# Altium PCB Carte_Herse_2020-4L.PcbDoc
Units mm, origin at the board's own origin, x right, y up, seen from the top; angles counter-clockwise.
Board outline 26 x 15.5 mm, 4 copper layers (Top Copper, Ground Plane, Power Plane, Bottom Copper), stack 1.57 mm thick; 4 components, 6 nets, 35 pads, 5 vias.
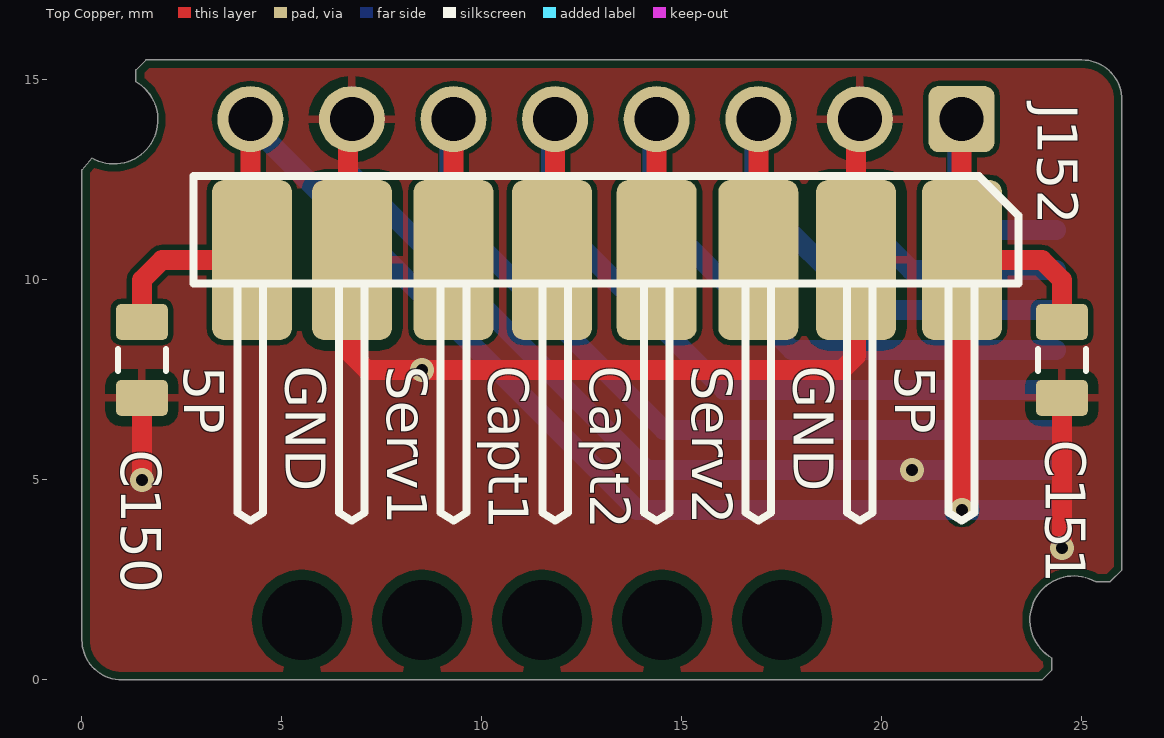
[diagram p0: Top Copper view]
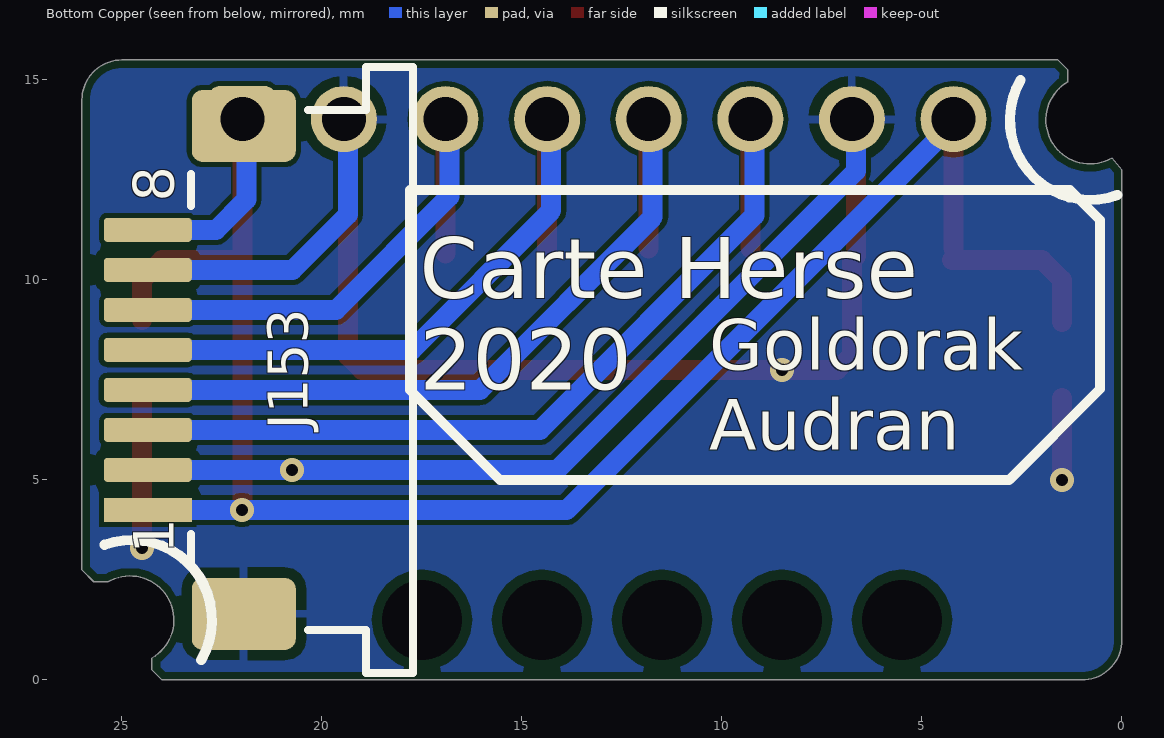
[diagram p1: Bottom Copper view, seen from below]
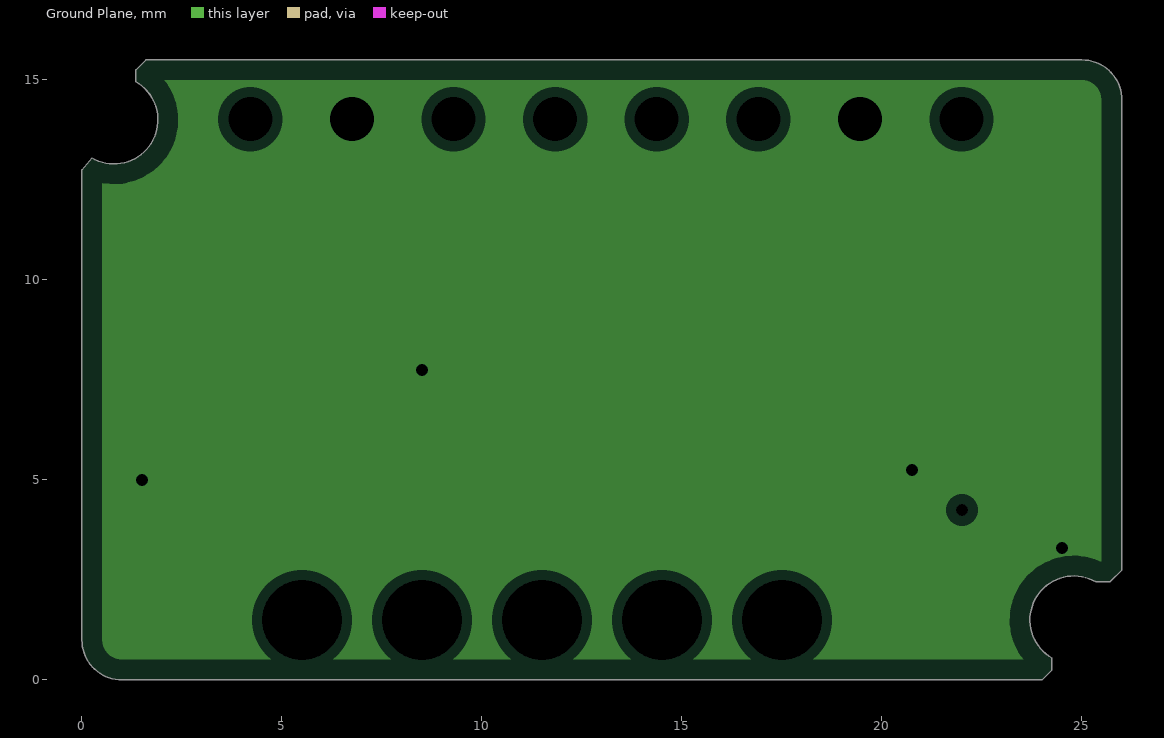
[diagram p2: Ground Plane, clearances drawn from the general rule]
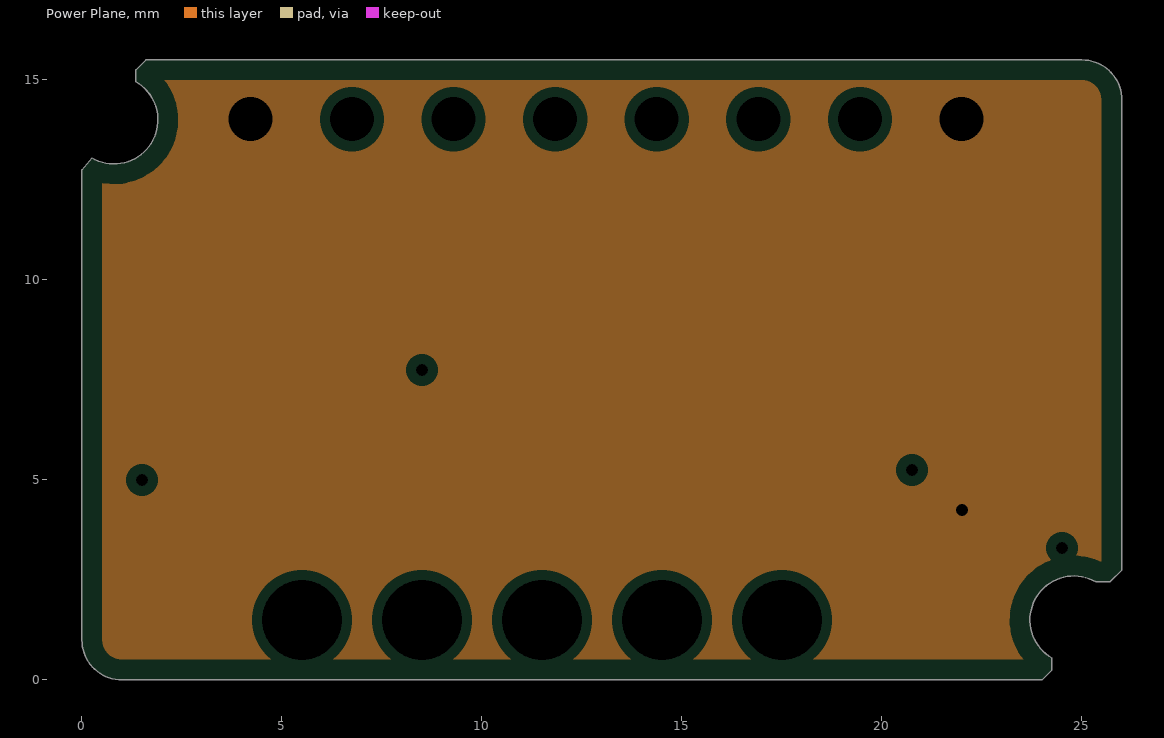
[diagram p3: Power Plane, clearances drawn from the general rule]
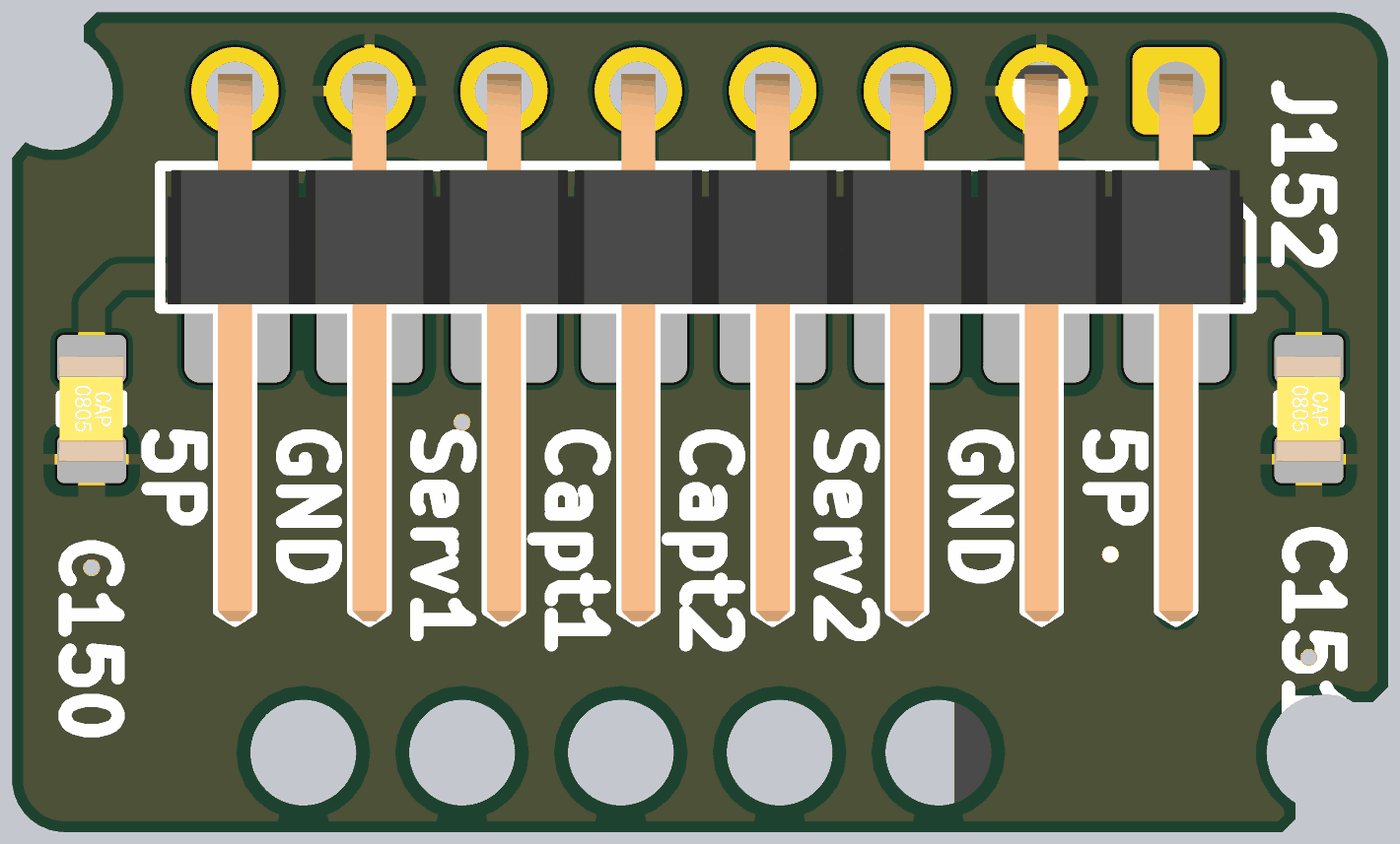
[diagram p4: 3D render of the assembled board from above, using the file's embedded part models]

## Layer stack, top to bottom
Top Mask: solder mask 0.015, Solder Resist, Dk 3.8
Top Copper: signal copper 0.035
Dielectric 1: prepreg 0.2, 7628, Dk 4.6
Ground Plane: plane copper 0.0175, net GND
Core: core 1.065, FR-4, Dk 4.5
Power Plane: plane copper 0.0175, net 5P
Dielectric 2: prepreg 0.2, 7628, Dk 4.6
Bottom Copper: signal copper 0.035
Bottom Mask: solder mask 0.015, Solder Resist, Dk 3.8

## Board outline
0,1 0,12.75 0.25,13.047 ccw(c0.8,14) 1.35,14.953 1.35,15.25 1.6,15.5 25,15.5 cw(c25,14.5) 26,14.5 26,2.75 25.703,2.453 25.35,2.453 ccw(c24.8,1.5) 24.25,0.547 24.25,0.25 24,0 1,0 cw(c1,1)

## Design rules (kind name [scope] priority, off if disabled: settings)
AssemblyTestPointUsage [All] p1 off:
AssemblyTestpoint [All] p1 off: testpointundercomponent=TRUE minsize=1.016 maxsize=2.54 preferedsize=1.524 minholesize=0 maxholesize=1.016 preferedholesize=0.813 testpointgrid=0.025 usegrid=TRUE gridtolerance=0 allowsidetop=TRUE allowsidebottom=TRUE
BoardOutlineClearance [All] p1: gap=0.2 ignorepadtopadclearanceinfootprint=FALSE
Clearance Clearance_Outer_layer [OnOutside] p1: gap=0.127 ignorepadtopadclearanceinfootprint=FALSE except(0.09: Arc-Arc Arc-Track Track-Track; 0.2: Arc-SMDPad Track-SMDPad; 0.254: Arc-Hole Track-Hole SMDPad-Hole THPad-Hole Via-Hole Fill-Hole Poly-Hole Region-Hole Text-Hole; 0.33: Arc-THPad Track-THPad SMDPad-THPad; 0.54: THPad-THPad)
Clearance Clearance_Inner_layer [not OnOutside] p2: gap=0.127 ignorepadtopadclearanceinfootprint=FALSE except(0.2: Arc-SMDPad Track-SMDPad; 0.254: Arc-Hole Track-Hole SMDPad-Hole THPad-Hole Via-Hole Fill-Hole Poly-Hole Region-Hole Text-Hole; 0.33: Arc-THPad Track-THPad SMDPad-THPad; 0.54: THPad-THPad)
ComponentClearance [IsComponent and (not (InComponent('J202') or InComponent('J204'))) vs IsComponent and (not (InComponent('J201') or InComponent('J203')))] p1: gap=0.2 collisioncheckmode=3 verticalgap=2540 showdistances=FALSE
DiffPairsRouting [All] p1 off: maxlimit=0.254 minlimit=0.254 mostfreqgap=0.254 toplayer_minwidth=0.381 toplayer_maxwidth=0.381 toplayer_prefwidth=0.381 bottomlayer_minwidth=0.381 bottomlayer_maxwidth=0.381 bottomlayer_prefwidth=0.381 maxuncoupledlength=12.7
FabricationTestPointUsage TestPointUsage [All] p1 off: valid=0 allowmultiple=FALSE
FabricationTestpoint Testpoint [All] p1 off: side=3 testpointundercomponent=TRUE minsize=1.016 maxsize=2.54 preferedsize=1.524 minholesize=0 maxholesize=1.016 preferedholesize=0.813 testpointgrid=0.025 allowsidetop=TRUE allowsidebottom=TRUE usegrid=TRUE gridtolerance=0
FanoutControl Fanout_BGA [IsBGA] p1 off: bgadir=Out bgaviamode=Centered fanoutstyle=Auto fanoutdirection=Alternating viagrid=0.025 // Fanout_BGA (Default Rule)
FanoutControl Fanout_LCC [IsLCC] p2 off: bgadir=Out bgaviamode=Centered fanoutstyle=Auto fanoutdirection=Alternating viagrid=0.025 // Fanout_LCC (Default Rule)
FanoutControl Fanout_SOIC [IsSOIC] p3 off: bgadir=Out bgaviamode=Centered fanoutstyle=Auto fanoutdirection=Alternating viagrid=0.025 // Fanout_SOIC (Default Rule)
FanoutControl Fanout_Small [(CompPinCount < 5)] p4 off: bgadir=Out bgaviamode=Centered fanoutstyle=Auto fanoutdirection=OutThenIn viagrid=0.025 // Fanout_Small (Default Rule)
FanoutControl Fanout_Default [All] p5 off: bgadir=Out bgaviamode=Centered fanoutstyle=Auto fanoutdirection=Alternating viagrid=0.025 // Fanout_Default (Default Rule)
HoleSize [All] p1: absolutevalues=TRUE maxlimit=6.3 minlimit=0.2 maxpercent=80.000 minpercent=20.000
HoleToHoleClearance ViaToViaClearance [IsVia vs IsVia] p1: gap=0.254 allowstackedmicrovias=TRUE
HoleToHoleClearance [All] p2: gap=0.54 allowstackedmicrovias=TRUE
MinimumAnnularRing [All] p1: minimumring=0.13
MinimumSolderMaskSliver [All] p1: minsoldermaskwidth=0.075
NetAntennae NetAntenna [All] p1: netantennaetolerance=0
PlaneClearance [All] p1: clearance=0.254
PlaneConnect [All] p1: planeconnectstyle=Direct reliefexpansion=0.3 reliefentries=4 reliefconductorwidth=0.3 reliefairgap=0.2
PolygonConnect [All] p1: thpad.connectstyle=Relief thpad.reliefconductorwidth=0.2 thpad.reliefentries=4 thpad.polygonreliefangle="90 Angle" thpad.airgapwidth=0.254 smdpad.connectstyle=Relief smdpad.reliefconductorwidth=0.2 smdpad.reliefentries=4 smdpad.polygonreliefangle="90 Angle" smdpad.airgapwidth=0.254 via.connectstyle=Direct via.reliefconductorwidth=0.2 via.reliefentries=4 via.polygonreliefangle="90 Angle" via.airgapwidth=0.254
RoutingVias [All] p1: holewidth=0.2 width=0.5 viastyle="Through Hole" minholewidth=0.2 minwidth=0.45 maxholewidth=0.3 maxwidth=0.9
SMDEntry [All] p1: side=TRUE corner=TRUE anyangle=TRUE
SilkToSilkClearance [All] p1 off: silktosilkclearance=0.15
SilkToSolderMaskClearance [IsPad] p1: minsilkscreentomaskgap=0.15 clearancetoexposedcopper=TRUE
SolderMaskExpansion [All] p1: expansion=0.05 istentingtop=FALSE
Width Width_Outer_Layer [OnLayer('Component Side') or OnLayer('Solder Side')] p1: maxlimit=3 minlimit=0.09 preferedwidth=0.15
Width Width_Inner_Layer [All] p2: maxlimit=3 minlimit=0.127 preferedwidth=0.15
11 further rules are at their usual default settings.

## Components (designator, comment, footprint, x,y, rotation, side; value= is the part's Value field where it differs from the comment)
C150 "1uF" "WCAP-CSGP_0805, 2x1.25x1.25" 1.5,8 r270 top
C151 "1uF" "WCAP-CSGP_0805, 2x1.25x1.25" 24.5,8 r270 top
J152 "61300811021" 61300811021 13.1,11.25 r0 top value=8
J153 "68610814122" 68610814122 20.504,7.75 r90 bottom value=8

## Footprints (in the part's own frame and the unit in brackets; to place one, negate y for a bottom-side part, rotate by r counter-clockwise, add the part's x,y. Pads: shape width x height; smd on the part's side, far side on the other; paste and mask are expansions set on the pad)
61300811021 [mm] "Pin Header, pitch 2.54 mm, THT, Angled, single row, 8p"
  rrect30% 1.65x1.65 hole 1.1: 1(8.89,2.77)
  round 1.65 hole 1.1: 2(6.35,2.77) 3(3.81,2.77) 4(1.27,2.77) 5(-1.27,2.77) 6(-3.81,2.77) 7(-6.35,2.77) 8(-8.89,2.77)
  silkscreen extent -10.31,-7.27 10.31,1.35, body extent -10.16,-7.27 10.16,3.09, height 2.58
68610814122 [mm] "ZIF Connectors, Horizontal, Top Contact, pitch 1mm, 8p"
  rect 0.6x2.2 smd: 1(-3.5,3.85)
  rrect30% 0.6x2.2 smd: 2(-2.5,3.85) 3(-1.5,3.85) 4(-0.5,3.85) 5(0.5,3.85) 6(1.5,3.85) 7(2.5,3.85) 8(3.5,3.85)
  rrect30% 1.8x2.6 smd: MP1(-6.1,1.45) MP2(6.1,1.45)
  silkscreen extent -7.58,-2.78 7.58,2.78, body extent -7.5,-2.7 7.5,4.4, height 3.02
"WCAP-CSGP_0805, 2x1.25x1.25" [mm] "WCAP-CSGP Ceramic Capacitors, size 0805, body 2x1.25x1.25"
  rrect30% 0.9x1.3 smd: 1(-0.95,0) 2(0.95,0)
  silkscreen extent -0.28,-0.6 0.28,0.6, body extent -1,-0.63 1,0.62, height 1.25

## Part data
C150 C151: library part "WCAP-CSGP, 885012207103", "CAP CER 1uF 50V X7R 0805", Manufacturer="Wurth Elektronik", Manufacturer Part Number=885012207103, RatedVoltage=50V, CeramicType=X7R, ComponentLink1Description=Datasheet, ComponentLink1URL=http://katalog.we-online.com/pbs/datasheet/885012207103.pdf, Size=0805, SUPPLIER 2=JLCPCB, Supplier Footprint 2=0805, SUPPLIER PART NUMBER 2=C28323
J152: "WR-PHD Header THT 2.54mm, Single Row, Angled, 8pin", Manufacturer="Wurth Electronics Inc.", SUPPLIER PART NUMBER 1=2356183, ComponentLink1Description=Datasheet, ComponentLink1URL=https://www.we-online.com/catalog/datasheet/61300811021.pdf, Manufacturer Part Number=61300811021, SUPPLIER 1=Farnell
J153: "WR-FPC SMT ZIF Horizontal Top Contact, pitch 1mm, 8p", Manufacturer="Wurth Electronics Inc.", SUPPLIER PART NUMBER 1=1641905, ComponentLink1Description=Datasheet, ComponentLink1URL=https://www.we-online.com/catalog/datasheet/68610814122.pdf, Manufacturer Part Number=68610814122, SUPPLIER 1=Farnell

## Free pads (board coordinates)
  rrect30% 2x4 smd: 3(4.25,10.5) 3(6.75,10.5) 3(9.29,10.5) 3(11.75,10.5) 3(14.37,10.5) 3(16.91,10.5) 3(19.35,10.5) 3(22,10.5)
  round 0 hole 2 unplated: 4(5.5,1.5) 4(8.5,1.5) 4(11.5,1.5) 4(14.5,1.5) 4(17.5,1.5)

## Via types
v1: diameter 0.6, hole 0.3, Top Copper to Bottom Copper, tented both sides, 5 vias

## Nets (pads, with @x,y where several pads share a name; then routed paths per layer and width w, separated by ;. In a path a pad name is that pad's centre, name@x,y a point inside that pad or via, vN(x,y) a via of type N, cw(c..) or ccw(c..) an arc to the next point about the centre after c; other vN are vias at no path point)
5P: C150.1 C151.1 J152.1 J152.8 J153.1 J153.8 J153.MP2 pad.3@4.25,10.5 pad.3@22,10.5 | length 49.8
  Top Copper w0.5: C150.1 1.5,10 2,10.5 pad.3@4.25,10.5 ; pad.3@4.21,10.79 J152.8 ; v1@21.99,4.25 J152.1 ; pad.3@22,10.5 24,10.5 24.5,10 C151.1@24.5,9
  Bottom Copper w0.5: J152.8@4.11,14.02 13.88,4.25 v1(22,4.25) J153.1 ; J152.1@21.89,14.02 21.89,12.01 22.65,11.25 J153.8
Capteur_1: J152.5 J153.4 pad.3@11.75,10.5 | length 20.1
  Top Copper w0.5: pad.3@11.83,10.79 J152.5
  Bottom Copper w0.5: J152.5@11.73,14.02 11.73,11.57 16.05,7.25 J153.4
Capteur_2: J152.4 J153.5 pad.3@14.37,10.5 | length 17
  Top Copper w0.5: pad.3@14.37,10.79 J152.4
  Bottom Copper w0.5: J152.4@14.27,14.02 14.27,11.73 17.75,8.25 J153.5
GND: C150.2 C151.2 J152.2 J152.7 J153.2 J153.7 J153.MP1 pad.3@6.75,10.5 pad.3@19.35,10.5 | length 60.6
  Top Copper w0.5: v1(1.5,5) C150.2 ; J152.7@6.65,14.02 6.65,10.6 6.75,10.5 6.75,8.125 7.125,7.75 v1(8.5,7.75) 19,7.75 19.35,8.1 19.35,10.5 19.35,11.633 J152.2@19.35,14.02 ; v1(24.5,3.3) C151.2
  Bottom Copper w0.5: J152.7@6.65,14.02 6.65,12.726 14.126,5.25 v1@20.733,5.25 ; J152.2@19.35,14.02 19.35,11.633 20.733,10.25 J153.7 ; v1(20.75,5.25) J153.2
Servo_1: J152.6 J153.3 pad.3@9.29,10.5 | length 23
  Top Copper w0.5: pad.3@9.29,10.79 J152.6
  Bottom Copper w0.5: J152.6@9.19,14.02 9.19,11.61 14.55,6.25 J153.3
Servo_2: J152.3 J153.6 pad.3@16.91,10.5 | length 14
  Top Copper w0.5: pad.3@16.91,10.66 J152.3
  Bottom Copper w0.5: J152.3@16.81,14.02 16.81,12.09 19.65,9.25 J153.6

## Polygon pours and split planes (outlines as drawn)
GND on Top Copper "Solder Side-GND" (solid, pour order 49): 26,0 26,15.5 0,15.5 0,0
GND on Bottom Copper "Component Side-GND" (solid, pour order 47): 26,0 26,15.5 0,15.5 0,0
GND on Ground Plane (split plane): 25.096,14.982 25.188,14.954 25.273,14.909 25.348,14.848 25.409,14.773 25.454,14.688 25.482,14.596 25.491,14.512 25.49,14.5 25.49,2.963 25.47,2.963 25.332,3.02 25.158,3.07 24.98,3.1 24.8,3.111 24.62,3.1 24.442,3.07 24.268,3.02 24.101,2.951 23.943,2.864 23.796,2.759 23.661,2.639 23.541,2.504 23.436,2.357 23.349,2.199 23.28,2.032 23.23,1.858 23.2,1.68 23.189,1.5 23.2,1.32 23.23,1.142 23.28,0.968 23.349,0.801 23.436,0.643 23.53,0.51 1,0.51 0.988,0.509 0.904,0.518 0.812,0.546 0.727,0.591 0.652,0.652 0.591,0.727 0.546,0.812 0.518,0.904 0.509,0.988 0.51,1 0.51,12.418 0.62,12.4 0.8,12.389 0.98,12.4 1.158,12.43 1.332,12.48 1.499,12.549 1.657,12.636 1.804,12.741 1.939,12.861 2.059,12.996 2.164,13.143 2.251,13.301 2.32,13.468 2.37,13.642 2.4,13.82 2.411,14 2.4,14.18 2.37,14.358 2.32,14.532 2.251,14.699 2.164,14.857 2.07,14.99 25,14.99 25.012,14.991
5P on Power Plane (split plane): 25.096,14.982 25.188,14.954 25.273,14.909 25.348,14.848 25.409,14.773 25.454,14.688 25.482,14.596 25.491,14.512 25.49,14.5 25.49,2.963 25.47,2.963 25.332,3.02 25.158,3.07 24.98,3.1 24.8,3.111 24.62,3.1 24.442,3.07 24.268,3.02 24.101,2.951 23.943,2.864 23.796,2.759 23.661,2.639 23.541,2.504 23.436,2.357 23.349,2.199 23.28,2.032 23.23,1.858 23.2,1.68 23.189,1.5 23.2,1.32 23.23,1.142 23.28,0.968 23.349,0.801 23.436,0.643 23.53,0.51 1,0.51 0.988,0.509 0.904,0.518 0.812,0.546 0.727,0.591 0.652,0.652 0.591,0.727 0.546,0.812 0.518,0.904 0.509,0.988 0.51,1 0.51,12.418 0.62,12.4 0.8,12.389 0.98,12.4 1.158,12.43 1.332,12.48 1.499,12.549 1.657,12.636 1.804,12.741 1.939,12.861 2.059,12.996 2.164,13.143 2.251,13.301 2.32,13.468 2.37,13.642 2.4,13.82 2.411,14 2.4,14.18 2.37,14.358 2.32,14.532 2.251,14.699 2.164,14.857 2.07,14.99 25,14.99 25.012,14.991

## Silkscreen, mask and mechanical layers (free items; w line width, h text height)
Top Overlay:
  text "5P" at 2.554,7.85 h1 r270
  text "GND" at 5.094,7.85 h1 r270
  text "Serv1" at 7.634,7.85 h1 r270
  text "Capt1" at 10.174,7.85 h1 r270
  text "Capt2" at 12.714,7.85 h1 r270
  text "Serv2" at 15.254,7.85 h1 r270
  text "GND" at 17.794,7.85 h1 r270
  text "5P" at 20.334,7.85 h1 r270
Bottom Overlay:
  lines w0.254: 0.116,12.121 ccw(c0.8,14) 2.532,15 ; 23.018,0.5 cw(c24.75,1.5) 25.434,3.379 ; 0.549,7.271 2.82,5 15.549,5 17.799,7.25 17.799,12.25 1.299,12.25 0.549,11.5 0.549,7.271
  text "Goldorak" at 10.32,7.75 h1.27
  text "Carte Herse / 2020" at 17.549,7.25 h1.52
  text "Audran" at 10.32,5.75 h1.27
Board Outline:
  lines w0.1: -39.254,266.475 cw(c-35.754,266.475) -35.754,269.975 ; 25,15.5 cw(c25,14.5) 26,14.5 26,2.75 25.703,2.453 25.35,2.453 ccw(c24.8,1.5) 24.25,0.547 24.25,0.25 24,0 1,0 cw(c1,1) 0,1 0,12.75 0.25,13.047 ccw(c0.8,14) 1.35,14.953 1.35,15.25 1.6,15.5 25,15.5 ; 25,15.5 25,15.5

## Dimensions
26,1 to 0,2.75 on Dimension
1,0 to 1.6,15.5 on Dimension

## Text inside footprints (layer, text, board x,y; h text height)
J153: Bottom Overlay "8" at 23.704,11.95 h1.02 r270; Bottom Overlay "1" at 23.704,3.15 h1.02 r270